# Altium PCB HALF_BRIDGE.PcbDoc
Units mil, origin at the board's own origin, x right, y up, seen from the top; angles counter-clockwise.
Board outline 1110.03 x 870.03 mil, 2 copper layers (Top Layer, Bottom Layer); 6 components, 5 nets, 26 pads, 0 vias.
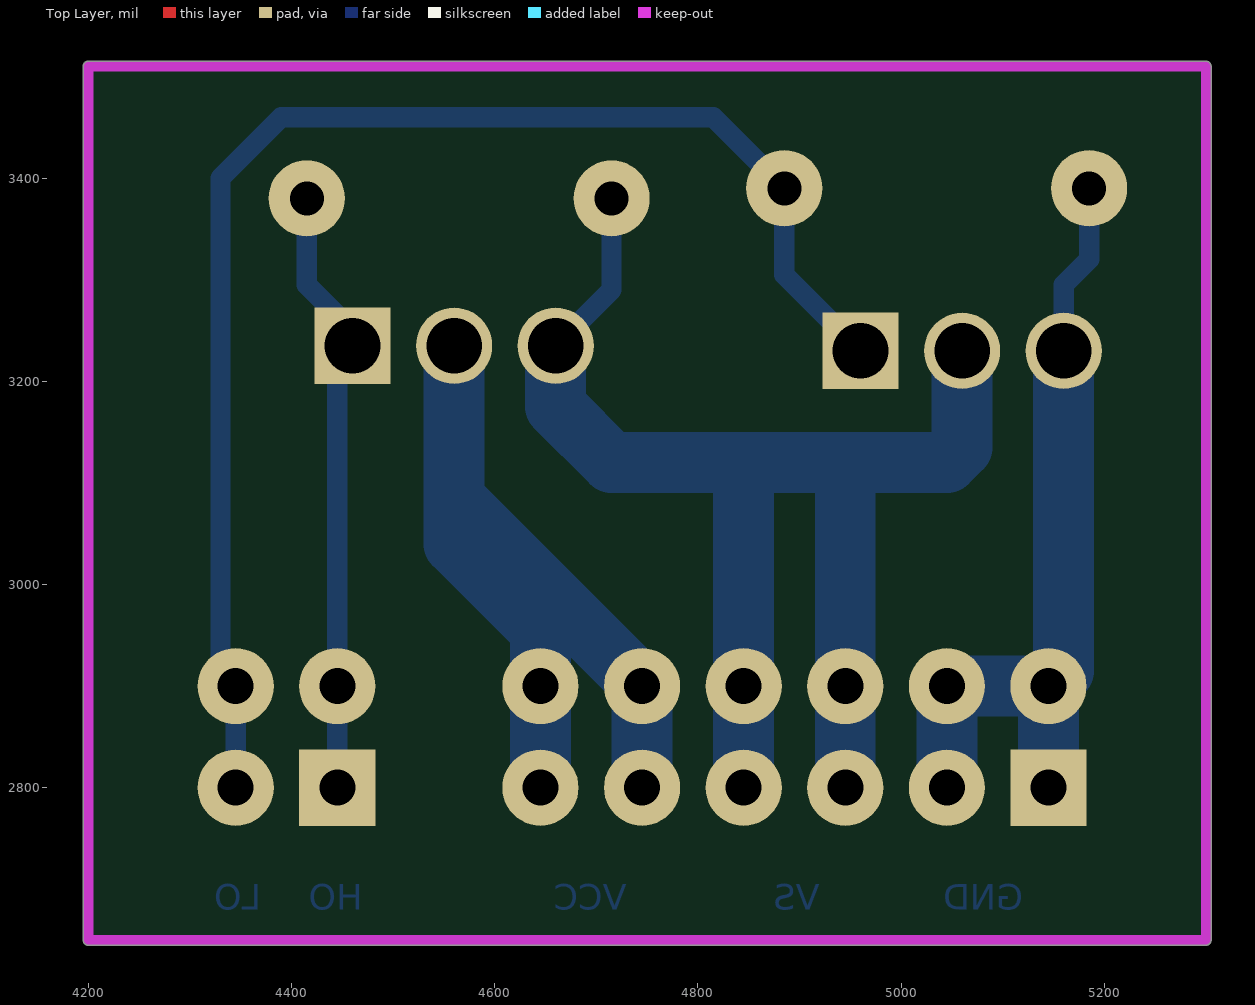
[diagram p0: Top Layer view]
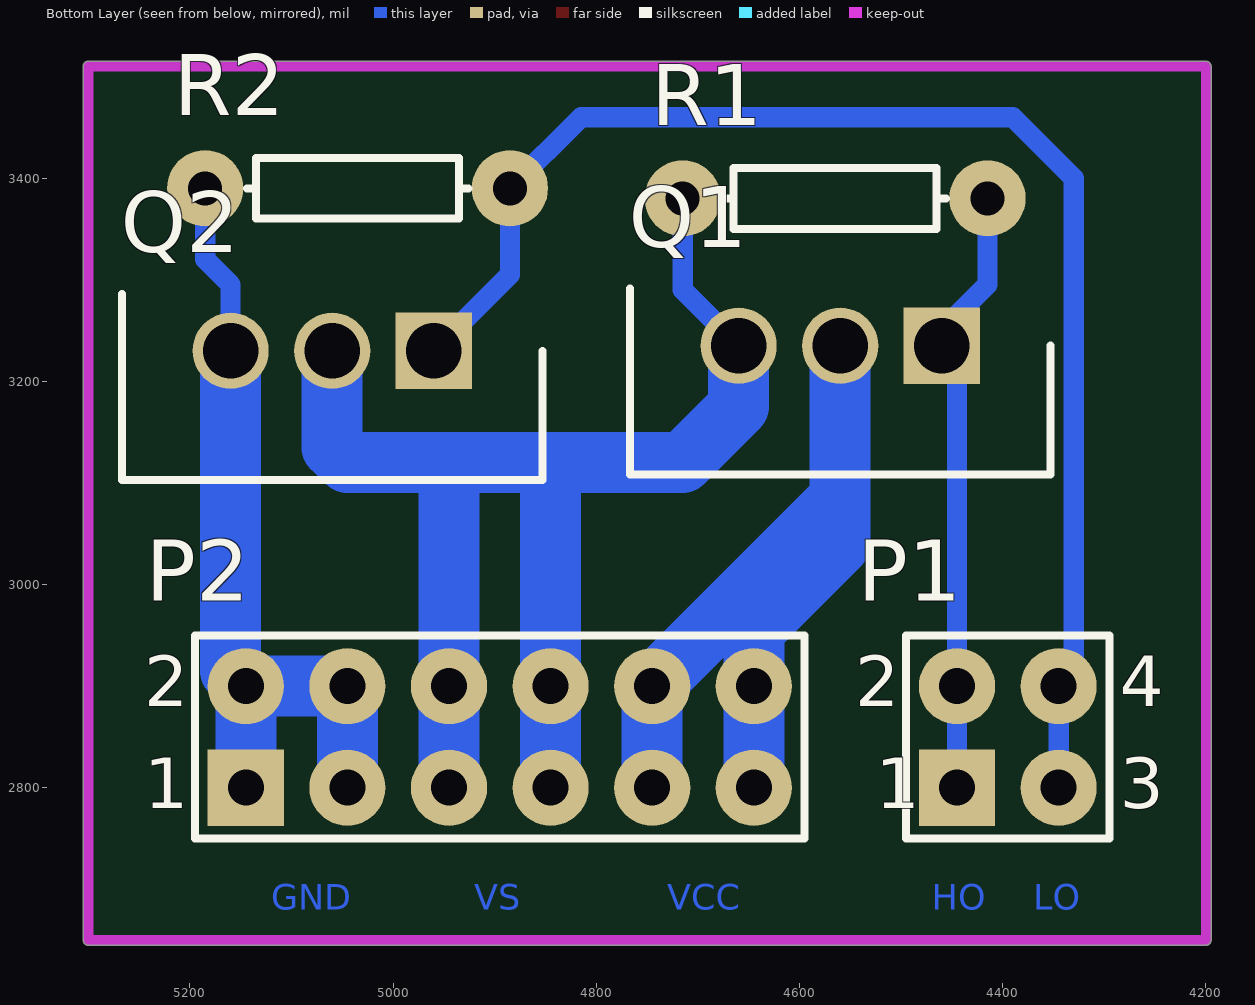
[diagram p1: Bottom Layer view, seen from below]

## Layer stack, top to bottom
Top Solder: solder mask 0.4, Solder Resist, Dk 3.5
Top Layer: signal copper 1.4
Dielectric 1: dielectric 12.6, FR-4, Dk 4.8
Bottom Layer: signal copper 1.4
Bottom Solder: solder mask 0.4, Solder Resist, Dk 3.5

## Board outline
5305.02,2650 cw(c5300,2650) 5300,2644.99 4200,2644.99 cw(c4200,2650) 4194.98,2650 4194.98,3510 cw(c4200,3510) 4200,3515.01 5300,3515.01 cw(c5300,3510) 5305.02,3510

## Design rules (kind name [scope] priority, off if disabled: settings)
Clearance [All] p1: gap=0 ignorepadtopadclearanceinfootprint=FALSE
PolygonConnect [All] p1: connectstyle=Relief reliefconductorwidth=10 reliefentries=4 polygonreliefangle="90 Angle" airgapwidth=10
RoomDefinition HALF_BRIDGE [InComponentClass('HALF_BRIDGE')] p1: confinementstyle=ConfineIn formatcopy=TRUE lockcomponents=FALSE outline 5300,2650 4200,2650 4200,3510 5300,3510
RoutingVias [All] p1: holewidth=28 width=50 viastyle="Through Hole" minholewidth=28 minwidth=50 maxholewidth=28 maxwidth=50
SolderMaskExpansion [All] p1: expansion=4
Width [All] p1: maxlimit=60 minlimit=10 preferedwidth=60 minimp=50.000000 maximp=50.000000 favimp=50.000000
30 further rules are at their usual default settings.

## Components (designator, comment, footprint, x,y, rotation, side; value= is the part's Value field where it differs from the comment)
P1 "Header 2X2" HDR2X2 4445,2800 r180 bottom
P2 "Header 6X2" HDR2X6 5145,2800 r180 bottom
Q1 "IRF540" TO254P465X1024X2050-3P 4460,3235 r0 bottom
Q2 "IRF540" TO254P465X1024X2050-3P 4960,3230 r0 bottom
R1 "Res1" AXIAL-0.3 4565,3380 r0 bottom value=20K
R2 "Res1" AXIAL-0.3 5035,3390 r0 bottom value=20K

## Footprints (in the part's own frame and the unit in brackets; to place one, negate y for a bottom-side part, rotate by r counter-clockwise, add the part's x,y. Pads: shape width x height; smd on the part's side, far side on the other; paste and mask are expansions set on the pad)
AXIAL-0.3 [mm] "Axial Device, Thru-Hole; 2 Leads; 0.3 in Pin Spacing"
  round 1.905 hole 0.85: 1(-3.81,0) 2(3.81,0)
  silkscreen extent -2.77,-0.76 2.77,0.76
HDR2X2 [mm] "Connector; Header; 2x2 Position"
  rect 1.905x1.905 hole 0.9: 1(0,0)
  round 1.905 hole 0.9: 2(0,2.54) 3(2.54,0) 4(2.54,2.54)
  silkscreen extent -1.27,-1.27 3.81,3.81
HDR2X6 [mm] "Connector; Header; 6x2 Position"
  rect 1.905x1.905 hole 0.9: 1(0,0)
  round 1.905 hole 0.9: 2(0,2.54) 3(2.54,0) 4(2.54,2.54) 5(5.08,0) 6(5.08,2.54) 7(7.62,0) 8(7.62,2.54) 9(10.16,0) 10(10.16,2.54) 11(12.7,0) 12(12.7,2.54)
  silkscreen extent -1.27,-1.27 13.97,3.81
TO254P465X1024X2050-3P [mm]
  rect 1.905x1.905 hole 1.39: 1(0,0)
  round 1.905 hole 1.39: 2(2.54,0) 3(5.08,0)
  silkscreen extent -2.72,-1.43 7.8,3.22, body extent -2.58,-1.43 7.66,3.22, height 18.77

## Part data
P1: "Header, 2-Pin, Dual row", LatestRevisionDate=17-Jul-2002, LatestRevisionNote="Re-released for DXP Platform.", Publisher="Altium Limited"
P2: "Header, 6-Pin, Dual row", LatestRevisionDate=17-Jul-2002, LatestRevisionNote="Re-released for DXP Platform.", Publisher="Altium Limited"
Q1 Q2: "Transistor", Manufacturer_Name=Vishay, Mouser Part Number=844-IRF540, RS Part Number=3683254, Allied_Number=70459367, Allied Price/Stock=https://www.alliedelec.com/siliconix-vishay-irf540/70459367/, Datasheet Link=http://www.vishay.com/docs/91021/91021.pdf, Height=4.65mm, Manufacturer_Part_Number=IRF540, Mouser Price/Stock=https://www.mouser.com/Search/Refine.aspx?Keyword=844-IRF540, RS Price/Stock=http://uk.rs-online.com/web/p/products/3683254
R1 R2: "Resistor", LatestRevisionDate=17-Jul-2002, LatestRevisionNote="Re-released for DXP Platform.", PackageDescription="Axial Device, Thru-Hole; 2 Leads; 0.3 in Pin Spacing", PackageReference=AXIAL-0.3, Published=8-Jun-2000, Publisher="Altium Limited"

## Nets (pads, with @x,y where several pads share a name; then routed paths per layer and width w, separated by ;. In a path a pad name is that pad's centre, name@x,y a point inside that pad or via, vN(x,y) a via of type N, cw(c..) or ccw(c..) an arc to the next point about the centre after c; other vN are vias at no path point)
GND: P2.1 P2.2 P2.3 P2.4 Q2.3 R2.2 | length 806.6
  Bottom Layer w20: Q2.3 5160,3295 5185,3320 R2.2
  Bottom Layer w60: P2.3 P2.4 P2.2 ; P2.1 P2.2 ; Q2.3 5160,2915 P2.2
HO: P1.1 P1.2 Q1.1 R1.1 | length 604.9
  Bottom Layer w20: R1.1 4415,3295 4460,3250 Q1.1 4445,3220 P1.2 P1.1
LO: P1.3 P1.4 Q2.1 R2.1 | length 1406.1
  Bottom Layer w20: P1.3 P1.4 4330,2915 4330,3400 4390,3460 4815,3460 R2.1 4885,3305 Q2.1
VCC: P2.9 P2.10 P2.11 P2.12 Q1.2 | length 831.8
  Bottom Layer w60: Q1.2 4560,3085 ; P2.11 P2.12 4645,2955 4560,3040 4560,3085 ; P2.9 P2.10 4560,3085
VS: P2.5 P2.6 P2.7 P2.8 Q1.3 Q2.2 R1.2 | length 1391.8
  Bottom Layer w20: Q1.3 4715,3290 R1.2
  Bottom Layer w60: Q1.3 4660,3175 4715,3120 4845,3120 ; P2.7 P2.8 4845,3120 ; P2.5 P2.6 4945,3120 ; Q2.2 5060,3135 5045,3120 4945,3120 ; 4845,3120 4945,3120

## Keep-outs
Keep-Out Layer:
  lines w10: 4200,2650 4200,3510 5300,3510 5300,2650 4200,2650

## Other copper
Bottom Layer:
  text "LO" at 4370,2680 h25
  text "HO" at 4470,2680 h25
  text "VCC" at 4730,2680 h25
  text "VS" at 4920,2680 h25
  text "GND" at 5120,2680 h25

## Text inside footprints (layer, text, board x,y; h text height)
P1: Bottom Overlay "1" at 4525,2780 h50; Bottom Overlay "2" at 4545,2880 h50; Bottom Overlay "4" at 4285,2880 h50; Bottom Overlay "3" at 4285,2780 h50
P2: Bottom Overlay "1" at 4525,2780 h50; Bottom Overlay "1" at 5245,2780 h50; Bottom Overlay "2" at 5245,2880 h50